# Allegro board avrusb500_2.brd
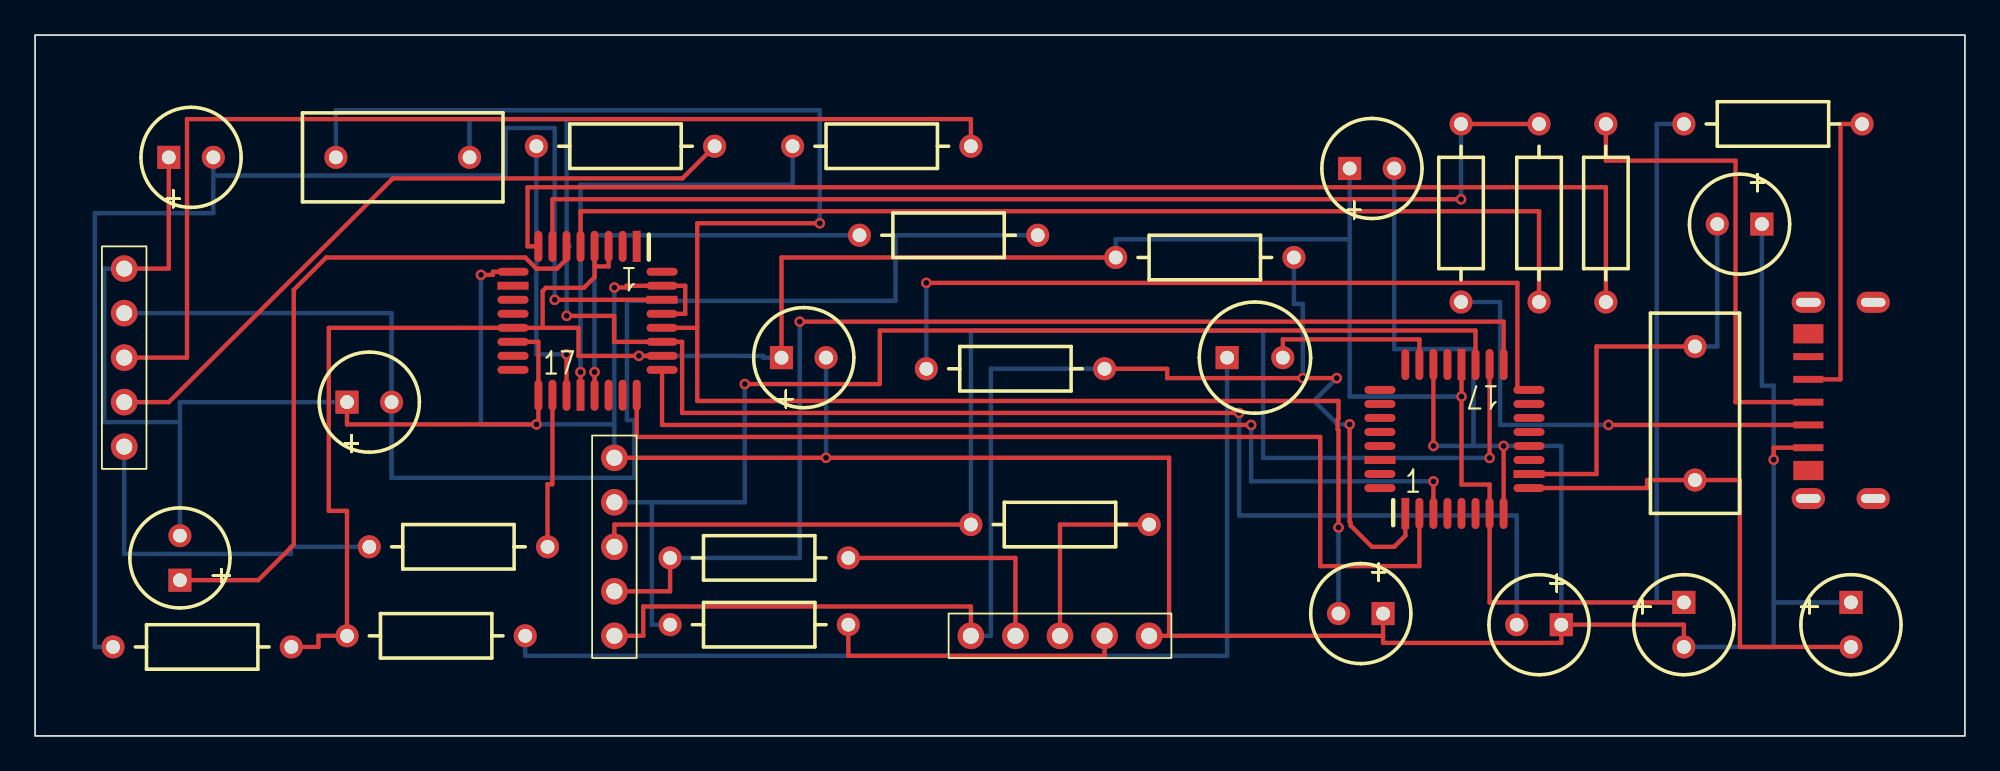
[diagram p0: board, top side]
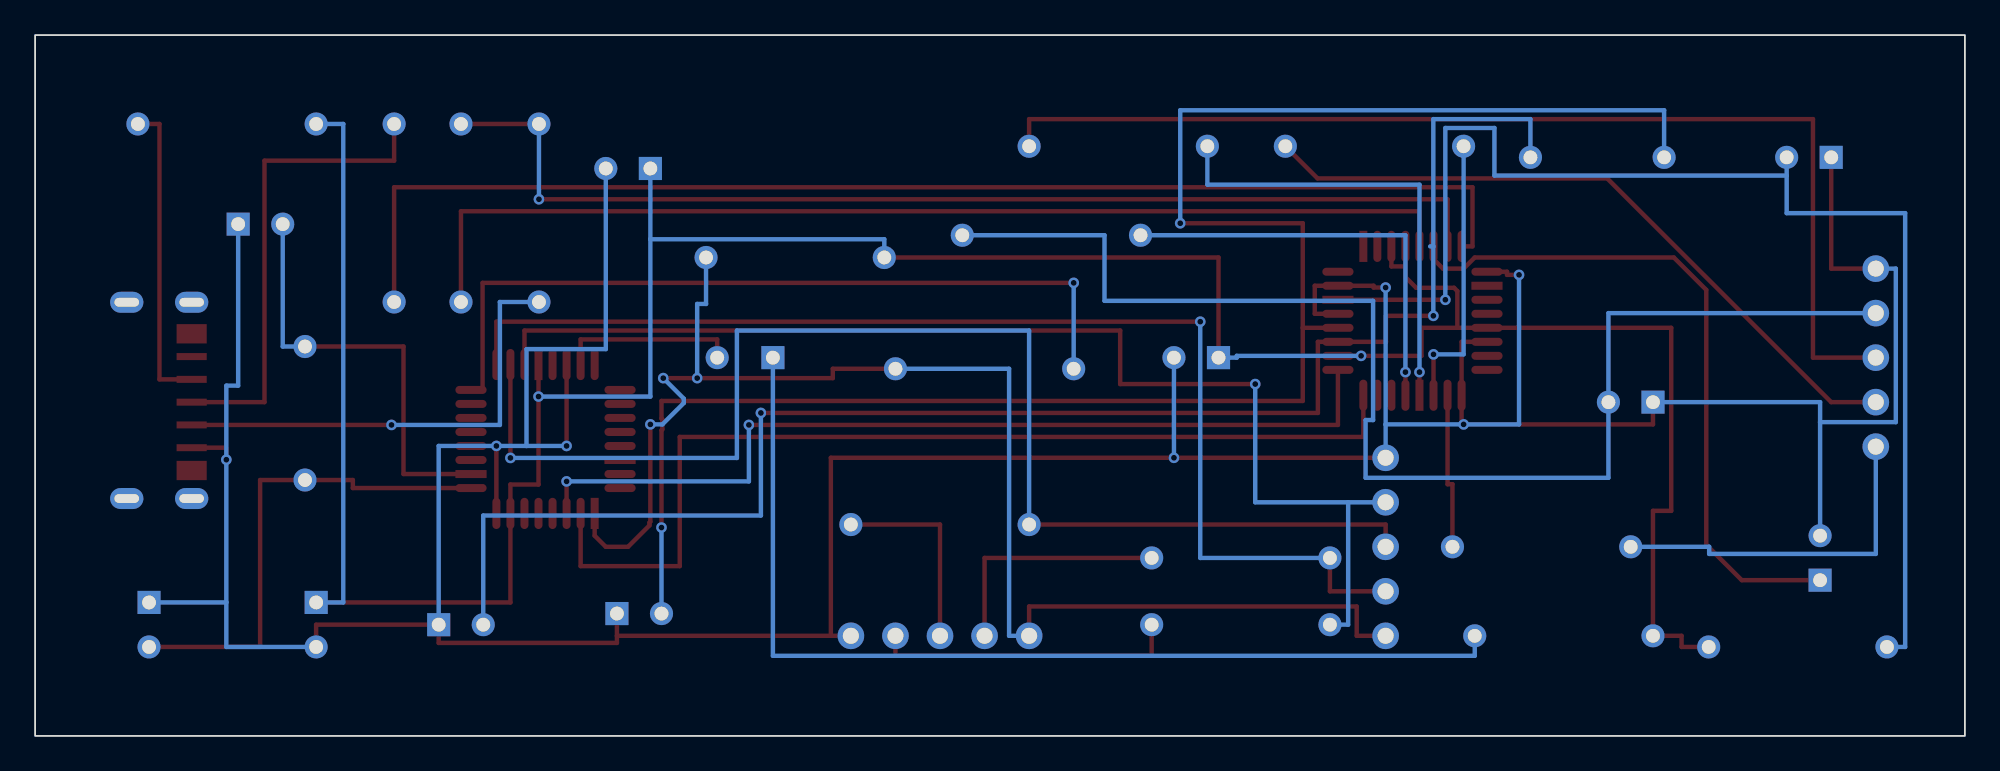
[diagram p1: board, bottom side, seen from below]

Outline 110 x 40 mm; copper layers: TOP, BOTTOM. Coordinates in mm from the lower left corner of the outline.
Outline path: rectangle 0,0 110,40

## Placement (name value [footprint] x y rotation side)
C1  47nF  [CPCYL1D225LS100031]  7.62 33.02 0 top
C2  27pF  [CPCYL1D225LS100031]  76.83 6.99 180 top
C3  27pF  [CPCYL1D225LS100031]  87 6.35 180 top
C4  47nF  [CPCYL1D225LS100031]  8.26 8.89 90 top
C5  100nF  [CPCYL1D225LS100031]  93.98 7.62 270 top
C6  1uF  [CPCYL1D225LS100031]  42.55 21.59 0 top
C7  100nF  [CPCYL1D225LS100031]  103.5 7.62 270 top
C8  100nF  [CPCYL1D225LS100031]  98.42 29.21 180 top
C9  100nF  [CPCYL1D225LS100031]  74.93 32.38 0 top
C10  22nF  [CPCYL1D225LS100031]  17.78 19.05 0 top
D1  LED  [CYLD250LS125031]  67.94 21.59 0 top
IC1  ATmega8  [QUAD80M32WG900]  78.11 12.7 0 top
J1  bbpg_Bitbang  [JUMPER5]  5.08 16.51 90 top
J2  USBA  [MY_USB]  104.78 19.05 90 top
J3  avrusb500_out  [JUMPER5]  53.34 5.71 0 top
J4  firmware_in  [JUMPER5]  33.02 5.71 90 top
R1  470  [AX400X100031]  4.45 5.08 0 top
R2  220  [AX400X100031]  46.99 28.57 0 top
R3  220  [AX400X100031]  43.18 33.66 0 top
R4  220  [AX400X100031]  28.57 33.66 0 top
R5  27  [AX400X100031]  89.53 34.92 270 top
R6  27  [AX400X100031]  81.28 24.77 90 top
R7  1.5k  [AX400X100031]  85.72 34.92 270 top
R8  2.2  [AX400X100031]  104.14 34.92 180 top
R9  10k  [AX400X100031]  61.59 27.3 0 top
R10  470  [AX400X100031]  27.94 5.71 180 top
R11  1k  [AX400X100031]  36.2 6.35 0 top
R12  220  [AX400X100031]  53.34 12.06 0 top
R13  1k  [AX400X100031]  36.2 10.16 0 top
R14  220  [AX400X100031]  29.21 10.79 180 top
R15  220  [AX400X100031]  50.8 20.95 0 top
U1  FT232BM  [QUAD80M32WG900]  34.29 27.94 180 top
Y1  3.6864Mhz  [RAD450X200LS300031]  94.61 22.23 270 top
Y2  6Mhz  [RAD450X200LS300031]  17.14 33.02 0 top

## Library data of the parts
C1-C5 C7-C10 = CAPACITOR NON-POL: alternate symbols: (SMDCAP)
C6 = CAPACITOR POL: alternate symbols: (SMDCAP)
D1 = LED
IC1 = ATmega8-DIL28_2
J1 J3 J4 = CON5: User Part Number: ***
J2 = CON4_7
R1-R15 = R: alternate symbols: (SMDRES)
U1 = FT232BM_2: alternate symbols: (JEDECMS026)
Y1 Y2 = ZTA

## Footprints (pads in the part's own frame, mm; a bottom-side part is the same pattern mirrored in y, then rotated)
AX400X100031
  round 1.321 hole 0.787: 1(0,0) 2(10.16,0)
CPCYL1D225LS100031
  rect 1.321x1.321 hole 0.787: 1(0,0)
  round 1.321 hole 0.787: 2(2.54,0)
CYLD250LS125031
  rect 1.321x1.321 hole 0.787: 1(0,0)
  round 1.321 hole 0.787: 2(3.175,0)
JUMPER5
  round 1.524 hole 0.914: 1(0,0) 2(2.54,0) 3(5.08,0) 4(7.62,0) 5(10.16,0)
MY_USB
  oval 1.2x1.9 hole 0.5x1.4: (-5.5,3.7) (-5.5,0) (5.7,3.7) (5.7,0)
  rect 1.1x1.72 smd: (-3.9,3.7) (3.9,3.7)
  rect 0.4x1.72 smd: 1(-2.6,3.7) 2(-1.3,3.7) 3(0,3.7) 4(1.3,3.7) 5(2.6,3.7)
QUAD80M32WG900
  rect 0.457x1.778 smd: 1(0,0) 20(3.2,8.496)
  oval 0.457x1.778 smd: 2(0.8,0) 3(1.6,0) 4(2.4,0) 5(3.2,0) 6(4,0) 7(4.801,0) 8(5.601,0) 17(5.601,8.496) 18(4.801,8.496) 19(4,8.496) 21(2.4,8.496) 22(1.6,8.496) 23(0.8,8.496) 24(0,8.496)
  oval 1.778x0.457 smd: 9(7.048,1.448) 11(7.048,3.048) 12(7.048,3.848) 13(7.048,4.648) 14(7.048,5.448) 15(7.048,6.248) 16(7.048,7.048) 25(-1.448,7.048) 26(-1.448,6.248) 27(-1.448,5.448) 28(-1.448,4.648) 29(-1.448,3.848) 31(-1.448,2.248) 32(-1.448,1.448)
  rect 1.778x0.457 smd: 10(7.048,2.248) 30(-1.448,3.048)
RAD450X200LS300031
  round 1.321 hole 0.787: 1(0,0) 2(7.62,0)

## Nets
+5V: J2.4 R8.1
GND: C1.1 C2.1 C3.1 C4.2 C5.2 C6.2 C7.1 C8.1 C9.2 C10.1 IC1.8(GND) IC1.22(AGND) J1.5 J2.1 J3.5 J4.5 U1.9(GND) U1.14(PWRCTL) U1.17(GND1) U1.29(AGND) U1.31(TEST)
VCC: C5.1 C6.1 C9.1 IC1.7(VCC) IC1.20(AVCC) R1.2 R8.2 R9.1 R10.2 U1.3(VCC) U1.4(RESET#) U1.13(VCC-IO) U1.26(VCC1)
BMISO: J1.3 R3.2
BMOSI: J1.2 R4.2
BRESET: J1.1 R14.2
BSCK: C10.2 J1.4 R2.2
D+: J2.2 R6.1
D-: J2.3 R5.1
F_MISO: IC1.18((MISO) PB4) J4.3 R12.1
F_MOSI: IC1.17((OC2/MOSI) PB3) J4.2 R13.1
F_SCK: IC1.19((SCK) PB5) J4.4 R11.1
MISO: J3.3 R12.2
MOSI: J3.2 R13.2
RESET: IC1.1(PC6 (R\E\S\E\T\)) J3.1 J4.1 R9.2 R15.2
RXD: IC1.2(PD0 (RXD)) U1.24(RXD)
SCK: J3.4 R11.2
TXD: IC1.3(PD1 (TXD)) U1.25(TXD)
N02483: R6.2 R7.1 U1.7(USBDP)
N02615: R5.2 U1.8(USBDM)
N03527: C4.1 U1.6(3V3OUT)
N06839: R2.1 U1.21(DTR#)
N06967: R3.1 U1.20(DSR#)
N07033: R4.1 U1.19(DCD#)
N07247: R14.1 U1.18(RI#)
N11951: R7.2 U1.5(RSTOUT#)
N15182: C7.2 IC1.9(PB6 (XT1/TOSC1)) Y1.2
N15289: C8.2 IC1.10(PB7 (XT2/TOSC2)) Y1.1
N19734: D1.2(CATHODE) IC1.23((ADC0) PC0)
N20572: D1.1(ANODE) R10.1
N22544: IC1.16((SS/OC1B) PB2) R15.1
N41098: C3.2 U1.27(XTIN) Y2.2
N41106: C2.2 U1.28(XTOUT) Y2.1
N49165: C1.2 R1.1 U1.30(AVCC)

Pads without a net: IC1 4 5 6 11 12 13 14 15 21 24 25 26 27 28 29 30 31 32; J2 5; U1 1 2 10 11 12 15 16 22 23 32

## Via types
v1: diameter 0.61, hole 0.33, TOP to BOTTOM, 28 vias

## Routing (per net, layer and track width the routed paths; a pad name or vN(x,y) marks a point on that pad's centre or on a via; arc(x,y) is an arc through that point)
+5V: length 17.6
  TOP w0.253: R8.1 102.91,34.92 102.91,20.35 J2.4
GND: length 258.8
  TOP w0.253: U1.14 28.69,22.49 U1.17 28.69,17.78 v1(28.57,17.78) 17.78,17.78 C10.1 ; v1(33.02,25.59) 33.7,25.59 33.7,25.69 U1.31 37.06,25.69 37.06,24.09 U1.29 ; U1.9 26.1,26.49 26.1,26.31 v1(25.42,26.31) ; C2.1 76.83,5.71 ; 76.83,5.71 76.83,5.31 87,5.31 C3.1 93.98,6.35 C5.2 ; 76.83,5.71 64.64,5.71 ; 64.64,5.71 64.64,15.88 v1(45.09,15.88) J4.5 ; 64.64,5.71 J3.5 ; C1.1 7.62,26.67 J1.5 ; J2.1 99.1,16.45 v1(99.1,15.77) ; IC1.8 v1(83.71,16.55) ; IC1.22 v1(79.7,16.55)
  BOTTOM w0.253: 33.02,17.78 J4.5 ; 33.02,17.78 v1(33.02,25.59) ; 33.02,17.78 v1(28.57,17.78) 25.42,17.78 v1(25.42,26.31) ; C5.2 99.1,5.08 99.1,7.62 ; J1.5 3.94,26.67 3.94,17.91 8.26,17.91 ; 99.1,7.62 v1(99.1,15.77) 99.1,19.99 98.42,19.99 C8.1 ; 99.1,7.62 C7.1 ; 81.99,16.55 v1(79.7,16.55) ; 81.99,16.55 v1(83.71,16.55) 87,16.55 C3.1 ; 81.99,16.55 81.99,22.08 77.47,22.08 C9.2 ; C10.1 8.26,19.05 8.26,17.91 ; 8.26,17.91 C4.2 ; C6.2 v1(45.09,15.88)
VCC: length 175.5
  TOP w0.253: 28.93,23.29 28.93,25.39 29.12,25.58 31.28,25.58 31.89,26.19 31.89,26.8 ; 28.93,23.29 U1.13 16.74,23.29 16.74,12.85 17.78,12.85 R10.2 16.15,5.71 16.15,5.08 R1.2 ; 28.93,23.29 30.97,23.29 30.97,21.69 v1(34.42,21.69) U1.26 ; IC1.20 v1(81.31,19.37) 81.31,14.35 82.91,14.35 IC1.7 82.91,7.62 C5.1 ; 31.89,26.8 32.69,26.8 U1.3 ; 31.89,26.8 U1.4 ; C6.1 42.55,27.3 R9.1
  BOTTOM w0.253: C6.1 41.5,21.59 41.5,21.69 v1(34.42,21.69) ; R9.1 61.59,28.35 74.93,28.35 ; 74.93,28.35 C9.1 ; 74.93,28.35 74.93,19.37 v1(81.31,19.37) ; R8.2 92.43,34.92 92.43,7.62 C5.1
BMISO: length 63.4
  TOP w0.253: R3.2 53.34,35.2 8.66,35.2 8.66,21.59 J1.3
BMOSI: length 39.7
  TOP w0.253: J1.2 7.62,19.05 20.39,31.82 36.9,31.82 R4.2
BRESET: length 20.5
  BOTTOM w0.253: R14.2 14.58,10.79 14.58,10.39 5.08,10.39 J1.1
BSCK: length 76.2
  BOTTOM w0.253: R2.2 49.04,28.57 49.04,24.83 33.73,24.83 33.73,18.03 34.16,18.03 34.16,14.73 20.32,14.73 C10.2 20.32,24.13 J1.4
D+: length 26.8
  TOP w0.253: J2.2 v1(89.69,17.75)
  BOTTOM w0.253: R6.1 83.51,24.77 83.51,17.75 v1(89.69,17.75)
D-: length 27.4
  TOP w0.253: J2.3 96.93,19.05 96.93,32.83 89.53,32.83 R5.1
F_MISO: length 74.8
  TOP w0.253: J4.3 33.02,12.06 R12.1 ; IC1.18 v1(82.91,15.87)
  BOTTOM w0.253: R12.1 53.34,23.14 70,23.14 70,15.87 v1(82.91,15.87)
F_MOSI: length 68.5
  TOP w0.253: v1(43.59,23.64) 83.71,23.64 IC1.17 ; 33.02,8.26 36.2,8.26 R13.1
  BOTTOM w0.253: R13.1 43.59,10.16 v1(43.59,23.64)
F_SCK: length 68.9
  TOP w0.253: IC1.19 82.11,23.14 48.15,23.14 48.15,20.08 v1(40.45,20.08)
  BOTTOM w0.253: R11.1 35.15,6.35 35.15,13.34 ; 35.15,13.34 J4.4 ; 35.15,13.34 40.45,13.34 v1(40.45,20.08)
MISO: length 11.4
  TOP w0.253: R12.2 58.42,12.06 J3.3
MOSI: length 14
  TOP w0.253: J3.2 55.88,10.16 R13.2
RESET: length 83
  TOP w0.253: J3.1 53.34,7.39 34.67,7.39 34.67,5.71 J4.1 ; IC1.1 78.11,11.43 77.47,10.79 76.2,10.79 74.98,12.02 74.98,12.18 74.93,12.23 v1(74.93,17.78) ; v1(74.19,20.42) v1(72.26,20.42) 64.53,20.42 64.53,20.95 R15.2
  BOTTOM w0.253: R15.2 54.48,20.95 54.48,5.71 J3.1 ; v1(72.26,20.42) 72.26,24.65 71.75,24.65 R9.2 ; v1(74.93,17.78) 74.24,17.78 73.03,19 73.03,19.25 v1(74.19,20.42)
RXD: length 57.4
  TOP w0.253: U1.24 34.29,17.07 73.25,17.07 73.25,9.69 78.91,9.69 IC1.2
SCK: length 17.5
  TOP w0.253: J3.4 60.96,4.57 46.35,4.57 R11.2
TXD: length 52.2
  TOP w0.253: IC1.3 v1(79.7,14.53) ; v1(69.31,17.75) 35.74,17.75 U1.25
  BOTTOM w0.253: v1(69.31,17.75) 69.31,14.53 v1(79.7,14.53)
N02483: length 63.2
  TOP w0.253: R7.1 R6.2 ; v1(81.28,30.63) 29.49,30.63 U1.7
  BOTTOM w0.253: v1(81.28,30.63) R6.2
N02615: length 71.9
  TOP w0.253: 28.57,27.94 28.07,27.94 28.07,31.31 89.53,31.31 R5.2
N03527: length 39.4
  TOP w0.253: C4.1 12.72,8.89 14.74,10.91 14.74,25.46 16.59,27.3 27.94,27.3 28.57,26.67 29.75,26.67 30.29,27.21 U1.6
N06839: length 24.2
  TOP w0.253: U1.21 v1(31.89,20.76)
  BOTTOM w0.253: R2.1 31.89,28.57 v1(31.89,20.76)
N06967: length 26.3
  TOP w0.253: U1.20 v1(31.09,20.76)
  BOTTOM w0.253: v1(31.09,20.76) 31.09,31.46 43.18,31.46 R3.1
N07033: length 15.9
  TOP w0.253: U1.19 v1(30.29,21.78)
  BOTTOM w0.253: v1(30.29,21.78) 28.57,21.78 R4.1
N07247: length 8.9
  TOP w0.253: U1.18 29.49,14.37 29.21,14.37 R14.1
N11951: length 61.8
  TOP w0.253: R7.2 85.72,29.94 31.09,29.94 U1.5
N15182: length 28.3
  TOP w0.253: IC1.9 91.89,14.15 91.89,14.61 Y1.2 97.17,14.61 97.17,5.08 C7.2
N15289: length 25
  TOP w0.253: IC1.10 89,14.95 89,22.23 Y1.1
  BOTTOM w0.253: Y1.1 95.89,22.23 C8.2
N19734: length 10.3
  TOP w0.253: D1.2 71.12,22.63 78.91,22.63 IC1.23
N20572: length 58.2
  BOTTOM w0.253: R10.1 27.94,4.57 67.94,4.57 D1.1
N22544: length 45.4
  TOP w0.253: IC1.16 84.49,19.75 84.49,25.86 v1(50.8,25.86)
  BOTTOM w0.253: R15.1 v1(50.8,25.86)
N41098: length 90.9
  TOP w0.253: v1(30.3,23.98) 33,23.98 33,22.49 U1.27 36.88,22.49 36.88,18.43 v1(68.63,18.43)
  BOTTOM w0.253: Y2.2 24.77,35.2 30.3,35.2 30.3,27.94 ; 30.3,27.94 30.48,27.94 ; 30.3,27.94 v1(30.3,23.98) ; v1(68.63,18.43) 68.63,12.58 84.45,12.58 C3.2
N41106: length 104.6
  TOP w0.253: 37.74,23.29 37.74,19.12 74.3,19.12 74.3,18.11 74.25,18.06 74.25,17.5 74.3,17.45 v1(74.3,11.89) ; 37.74,23.29 U1.28 ; 37.74,23.29 37.74,29.26 v1(44.73,29.26)
  BOTTOM w0.253: 74.3,6.99 v1(74.3,11.89) ; Y2.1 17.14,35.71 44.73,35.71 v1(44.73,29.26)
N49165: length 73.8
  TOP w0.253: U1.30 v1(29.62,24.89)
  BOTTOM w0.253: C1.2 10.16,31.98 ; 10.16,31.98 26.82,31.98 26.82,34.7 29.62,34.7 v1(29.62,24.89) ; 10.16,31.98 10.16,29.84 3.4,29.84 3.4,5.08 R1.1
